# Altium PCB Eliot12L-Base02.PcbDoc
Units mm, origin at the board's own origin, x right, y up, seen from the top; angles counter-clockwise.
Board outline 44.58 x 44.59 mm, 2 copper layers (Top Layer, Bottom Layer), stack 1.569 mm thick; 29 components, 22 nets, 71 pads, 13 vias.
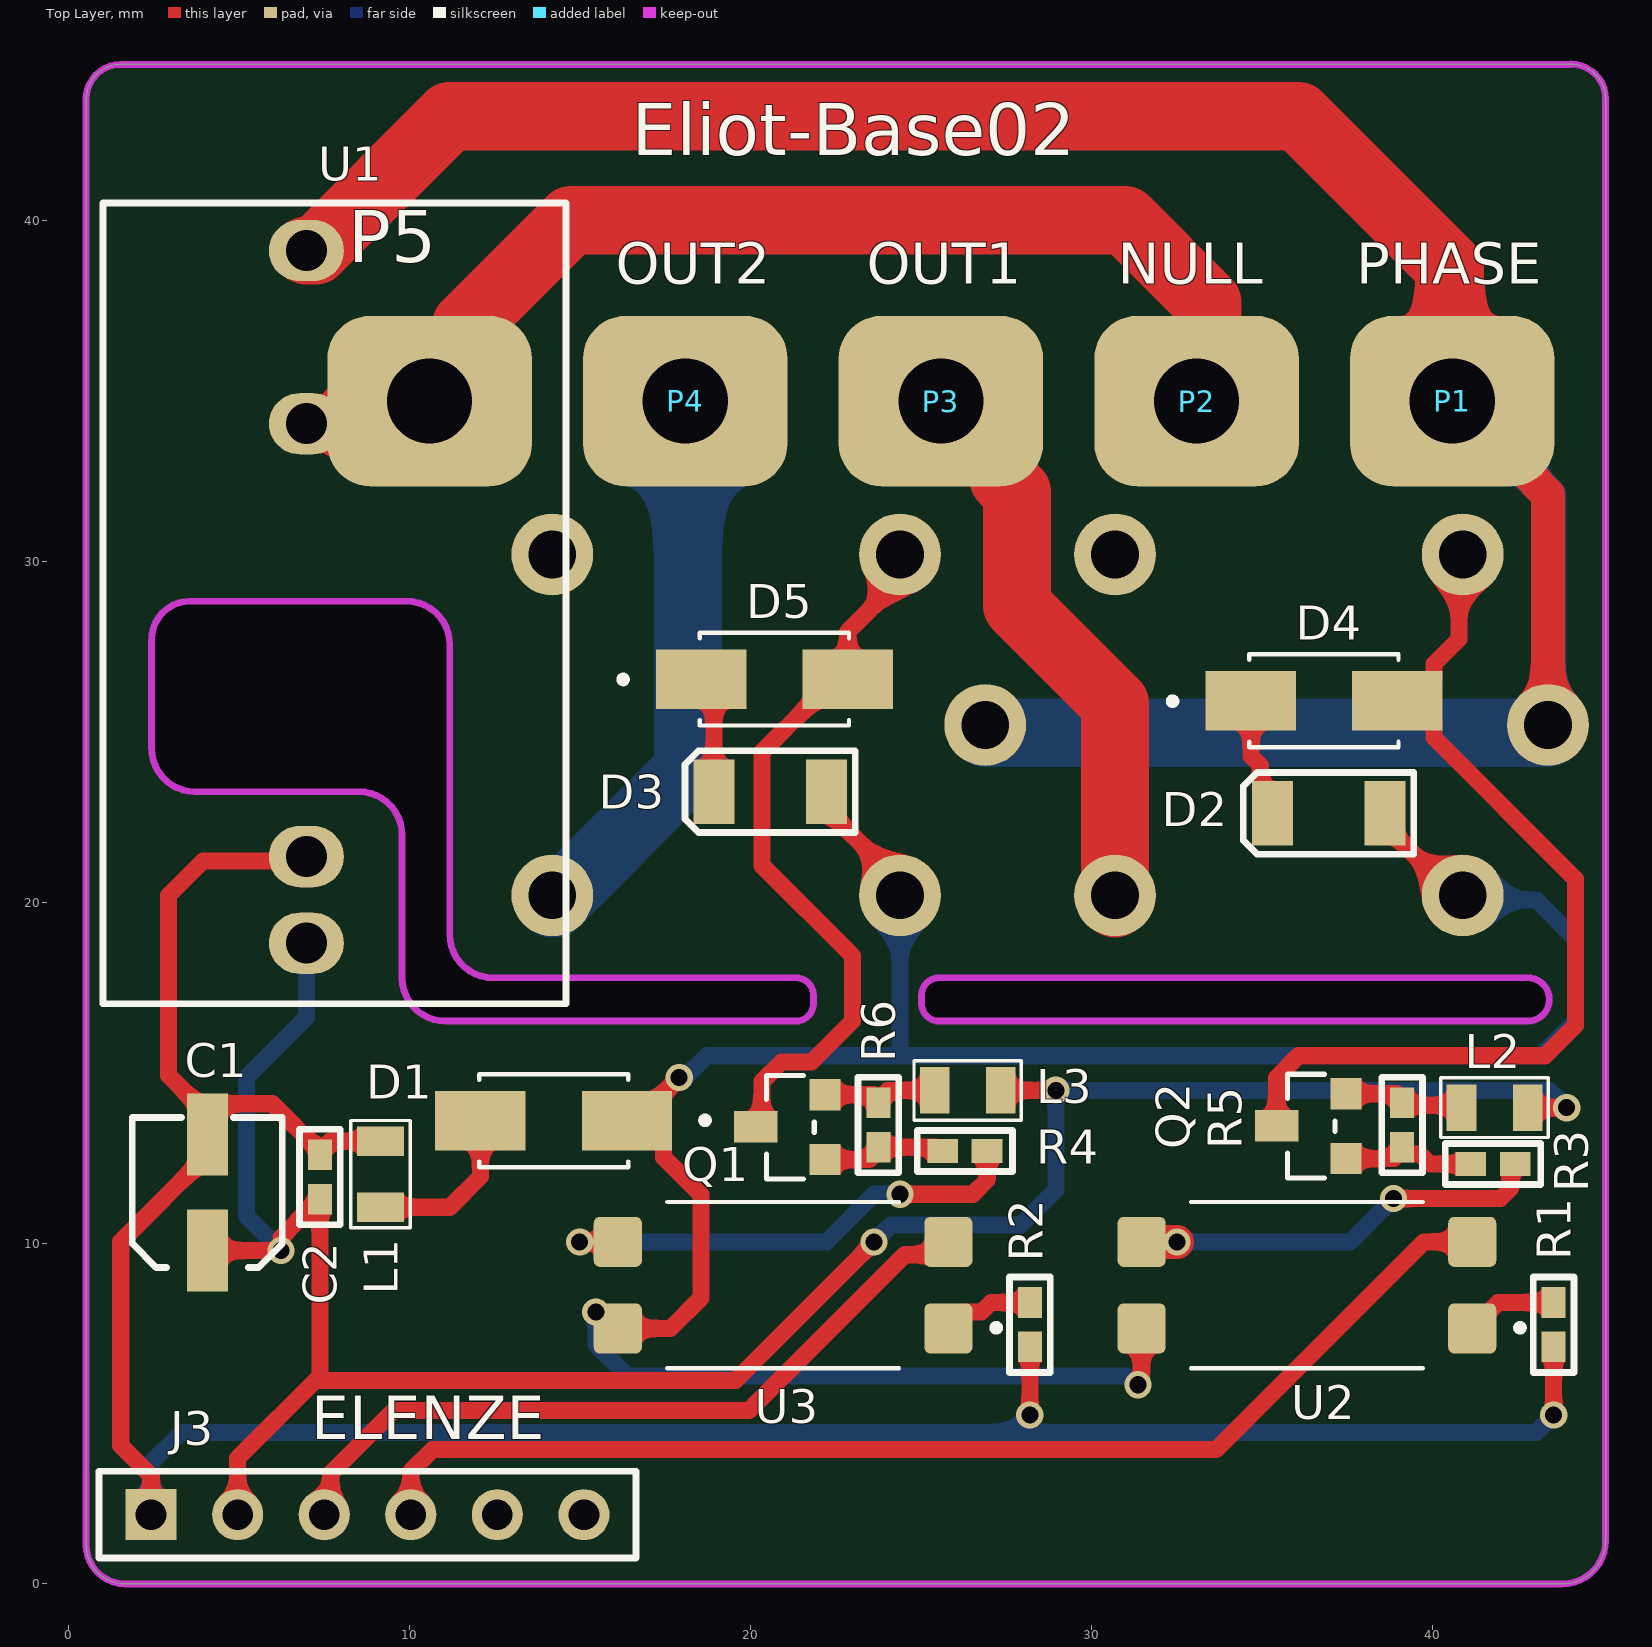
[diagram p0: Top Layer view]
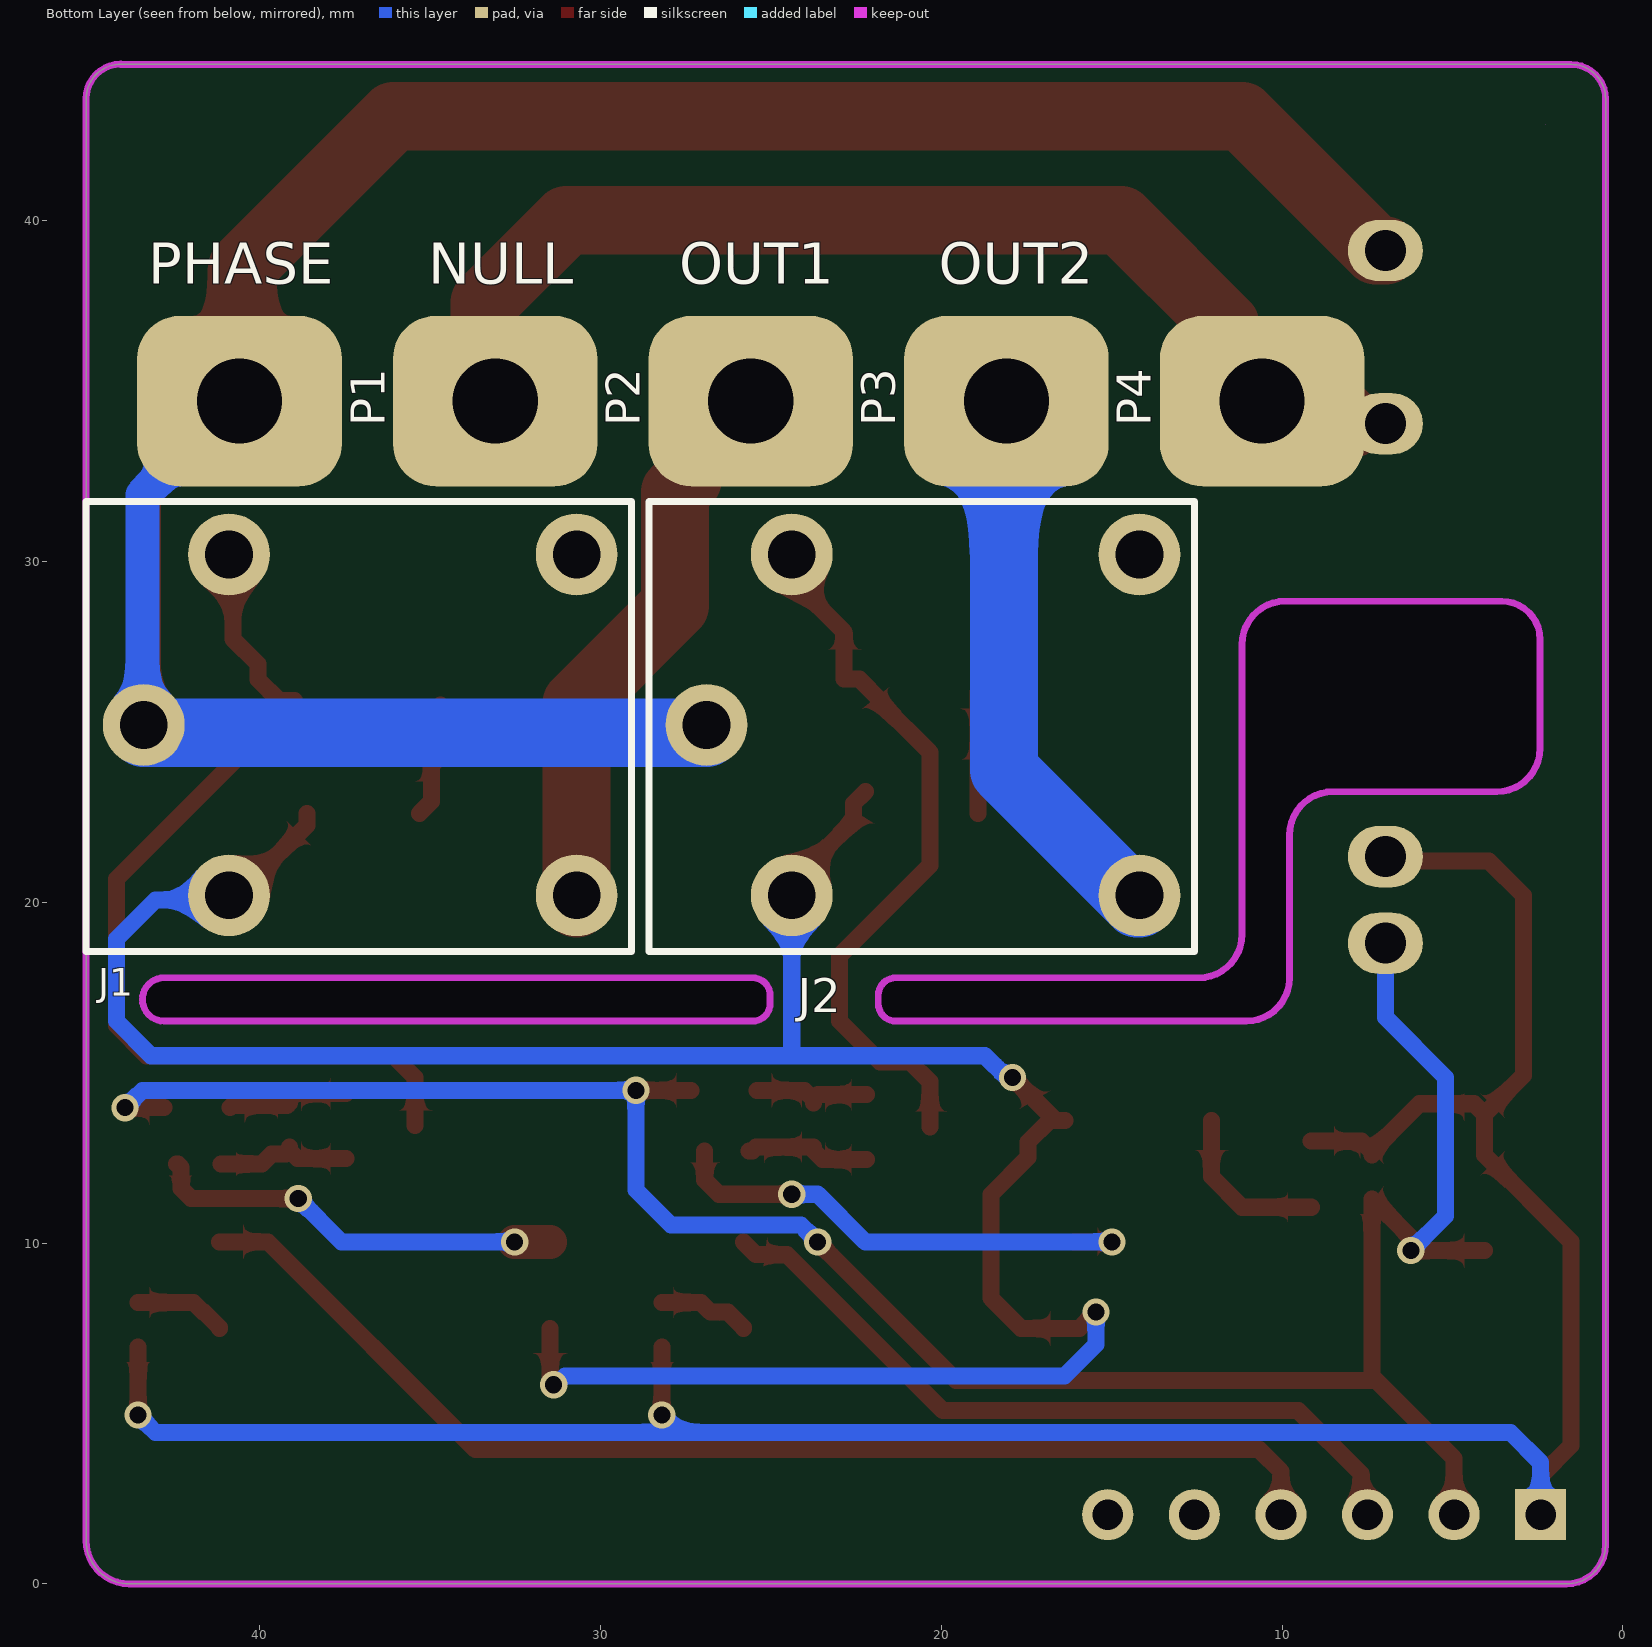
[diagram p1: Bottom Layer view, seen from below]

## Layer stack, top to bottom
Top Solder: solder mask 0.0254, SM-001, Dk 4
Top Layer: signal copper 0.035
Dielectric 1: core 1.4986, Core-043, Dk 4.3
Bottom Layer: signal copper 0.035
Bottom Solder: solder mask 0.0254, SM-001, Dk 4

## Board outline
0.508,1.143 0.508,43.561 cw(c1.524,43.561) 1.524,44.577 44.077,44.577 44.069,44.585 cw(c44.069,43.569) 45.085,43.569 45.085,1.27 cw(c43.815,1.27) 43.815,0 1.651,0 cw(c1.651,1.143)
cut-out: 3.556,28.829 9.906,28.829 cw(c9.906,27.559) 11.176,27.559 11.176,19.05 ccw(c12.446,19.05) 12.446,17.78 21.336,17.78 cw(c21.336,17.272) 21.844,17.272 21.844,17.018 cw(c21.336,17.018) 21.336,16.51 11.049,16.51 cw(c11.049,17.78) 9.779,17.78 9.779,21.971 ccw(c8.509,21.971) 8.509,23.241 3.701,23.241 cw(c3.701,24.511) 2.431,24.511 2.431,27.704 cw(c3.556,27.704)
cut-out: 25.019,17.272 cw(c25.527,17.272) 25.527,17.78 42.799,17.78 cw(c42.799,17.145) 43.434,17.145 cw(c42.799,17.145) 42.799,16.51 25.527,16.51 cw(c25.527,17.018) 25.019,17.018
cut-out: 2.286,42.799

## Design rules (kind name [scope] priority, off if disabled: settings)
Clearance [All] p1: gap=0.254 ignorepadtopadclearanceinfootprint=FALSE except(0: Arc-Hole Track-Hole SMDPad-Hole THPad-Hole Via-Hole Fill-Hole Poly-Hole Region-Hole Text-Hole)
MinimumSolderMaskSliver [All] p1: minsoldermaskwidth=0
PolygonConnect [All] p1: connectstyle=Relief reliefconductorwidth=0.254 reliefentries=4 polygonreliefangle="90 Angle" airgapwidth=0.254
RoutingVias [All] p1: holewidth=0.711 width=1.27 viastyle="Through Hole" minholewidth=0.711 minwidth=1.27 maxholewidth=0.711 maxwidth=1.27
SilkToSilkClearance [All] p1: silktosilkclearance=0
SilkToSolderMaskClearance [IsPad] p1: minsilkscreentomaskgap=0 clearancetoexposedcopper=TRUE
SolderMaskExpansion [All] p1: expansion=0.102 istentingtop=FALSE
Width [All] p1: maxlimit=3 minlimit=0.5 preferedwidth=0.5 minimp=50.000000 maximp=50.000000 favimp=50.000000
27 further rules are at their usual default settings.

## Components (designator, comment, footprint, x,y, rotation, side; value= is the part's Value field where it differs from the comment)
C1 "Cap Pol" EL_C_4_5 4.064,11.479 r90 top value=10uF
C2 "Cap" 0402 7.366,11.938 r90 top value=100nF
D1 "US1M-13-F" DIO_ES1J 14.224,13.589 r180 top
D2 "Diode Zener" DO1206 36.957,22.606 r180 top
D3 "Diode Zener" DO1206 20.574,23.241 r180 top
D4 "US1M-13-F" DIO_ES1J 36.821,25.908 r0 top
D5 "US1M-13-F" DIO_ES1J 20.701,26.543 r0 top
J1 "HJR-78F" RELAY 40.894,20.2 r180 bottom
J2 "HJR-78F" RELAY 24.384,20.2 r180 bottom
J3 "HEADER1x6" "M-Header 6" -21.463,-10.033 r0 top
L1 "EBMS201209A101" IND0805 -33.912,46.516 r270 top
L2 "EBMS201209A101" IND0805 76.326,57.026 r180 top
L3 "EBMS201209A101" IND0805 60.867,57.534 r180 top
P1 "MetalPin" MetalPin#1 5.715,33.401 r0 top
P2 "MetalPin" MetalPin#2 13.589,33.782 r0 top
P3 "MetalPin" MetalPin#3 22.987,34.163 r0 top
P4 "MetalPin" MetalPin#4 31.75,34.163 r0 top
P5 "MetalPin" MetalPin#5 24.714,35.388 r0 top
Q1 "SS8050" SOT-23 22.185,12.446 r90 top
Q2 "SS8050" SOT-23 37.465,12.476 r90 top
R1 "Res" 0402 43.561,7.605 r90 top value=1K
R2 "Res" 0402 28.194,7.605 r90 top value=1K
R3 "Res" 0402 41.783,12.319 r180 top value=1K
R4 "Res" 0402 26.289,12.7 r180 top value=1K
R5 "Res" 0402 39.116,13.462 r270 top value=10K
R6 "Res" 0402 23.749,13.462 r270 top value=10K
U1 "WX-DC12003" WX-DC12003 8.62,29.718 r180 top
U2 "EL817S1" SOIC254P1030X390-4N_EL817(S1)(A)(TU)-VG 36.322,8.763 r180 top
U3 "EL817S1" SOIC254P1030X390-4N_EL817(S1)(A)(TU)-VG 20.955,8.763 r180 top

## Footprints (in the part's own frame and the unit in brackets; to place one, negate y for a bottom-side part, rotate by r counter-clockwise, add the part's x,y. Pads: shape width x height; smd on the part's side, far side on the other; paste and mask are expansions set on the pad)
0402 [mm] "Chip Resistor, 2-Leads, Body 1.0x0.5mm, IPC Medium Density"
  rect 0.9x0.7 smd mask+0.15: 1(-0.65,0) 2(0.65,0)
  Top Layer pour cut-out: -0.508,0.889 0.508,0.889 0.508,-0.889 -0.508,-0.889
  silkscreen extent -1.4,-0.6 1.4,0.6, body extent -0.53,-0.25 0.47,0.25, height 0.27
DIO_ES1J [mm]
  rect 2.65x1.75 smd: A(2.15,0) K(-2.15,0)
  silkscreen extent -4.54,-1.36 2.19,1.36
DO1206 [mm] "MELF Diode, 2-Leads, Body 3.5x1.7mm, IPC Medium Density"
  rect 1.2x1.9 smd mask+0.15: 1(-1.65,0) 2(1.65,0)
  Top Layer pour cut-out: -1.397,1.524 1.397,1.524 1.397,-1.524 -1.397,-1.524
  silkscreen extent -2.5,-1.2 2.5,1.2, body extent -1.85,-0.86 1.85,0.86, height 1.71
EL_C_4_5 [mm]
  rect 2.4x1.2 smd: 1(1.7,0) 2(-1.7,0)
  silkscreen extent -2.2,-2.2 2.2,2.2, body extent -2.5,-2.15 2.5,2.15, height 5.5
IND0805 [mm]
  rect 0.87x1.37 smd: 1(33.527,43.056) 2(35.467,43.056)
  silkscreen extent 32.92,42.18 36.07,43.93, body extent 33.47,42.41 35.52,43.71, height 0.5
"M-Header 6" [mm]
  rect 1.5x1.5 hole 0.9: 1(23.876,12.065)
  round 1.5 hole 0.9: 2(26.416,12.065) 3(28.956,12.065) 4(31.496,12.065) 5(34.036,12.065) 6(36.576,12.065)
  silkscreen extent 22.35,10.79 38.1,13.33, body extent 22.36,10.81 38.1,13.31, height 5
MetalPin#1 [mm]
  rrect50% 6x5 hole 2.5: 1(34.87,1.299)
MetalPin#2 [mm]
  rrect50% 6x5 hole 2.5: 1(19.496,0.918)
MetalPin#3 [mm]
  rrect50% 6x5 hole 2.5: 1(2.598,0.537)
MetalPin#4 [mm]
  rrect50% 6x5 hole 2.5: 1(-13.665,0.537)
MetalPin#5 [mm]
  rrect50% 6x5 hole 2.5: 1(-14.129,-0.688)
RELAY [mm]
  round 2.4 hole 1.4: 1(-2.5,5) 2(10.2,10) 3(10.2,0) 4(0,0) 5(0,10)
  silkscreen extent -4.19,-1.65 11.81,11.56
SOIC254P1030X390-4N_EL817(S1)(A)(TU)-VG [mm]
  rrect25% 1.41x1.47 smd: 1(-4.85,1.27) 2(-4.85,-1.27) 3(4.85,-1.27) 4(4.85,1.27)
  silkscreen extent -6.35,-2.44 3.4,2.44
SOT-23 [mil]
  rect 36x36 smd: 1(0,0) 2(75,0)
  rect 36x50 smd: 3(38,80)
  silkscreen extent -22,12 97,68
WX-DC12003 [mm]
  oval 2.2x1.8 hole 1.2 mask+0.15: 1(1.651,-9.398) 2(1.651,-4.318) 3(1.651,10.922) 4(1.651,8.382)
  silkscreen extent -5.97,-10.8 7.62,12.7, body extent -5.9,-10.76 7.59,12.74, height 18.25

## Part data
C1: "Polarized Capacitor (Axial)", LatestRevisionDate=17-Jul-2002, LatestRevisionNote="Re-released for DXP Platform.", PackageDescription="Polarized Capacitor; 2 Leads", PackageReference=POLAR0.8, Published=8-Jun-2000, Publisher="Altium Limited"
C2: "Capacitor", LatestRevisionDate=17-Jul-2002, LatestRevisionNote="Re-released for DXP Platform.", PackageDescription="Radial Cap, Thru-Hole; 2 Leads; 0.3 in Pin Spacing", PackageReference=RAD-0.3, Published=8-Jun-2000, Publisher="Altium Limited"
D1 D4 D5: "Diode Standard 1000V 1A Surface Mount SMA", Package="DO-214 Diodes Inc.", Availability=Unavailable, MF="Diodes Inc.", MP=US1M-13-F, Price=None, SnapEDA_Link=https://www.snapeda.com/parts/US1M-13-F/Diodes%20Inc./view-part/270779/?ref=snap
D2 D3: "Zener Diode", LatestRevisionDate=17-Jul-2002, LatestRevisionNote="Re-released for DXP Platform.", PackageDescription="Diode, Thru-Hole; 2 Leads; 0.7 in Pin Spacing", PackageReference=DIODE-0.7, Published=8-Jun-2000, Publisher="Altium Limited"
J1 J2: "20A switching capability Small size auto Relay", Manufacturer=Tianbo, Package="Through Hole", Part Number="TRKM S-Z"
J3: "HEADER 1x6"
L1 L2 L3: library part "INDUCTOR SMD", "INDUCTOR SMD"
Q1 Q2: "NPN General Purpose Amplifier", ComponentLink1Description="Manufacturer Link", ComponentLink1URL=http://www.fairchildsemi.com/, ComponentLink2Description=Datasheet, ComponentLink2URL=http://www.fairchildsemi.com/ds/2N%2F2N3904.pdf, DatasheetVersion=1997, LatestRevisionDate=15-Jan-2003, LatestRevisionNote="PCB Footprint 'BCY-W3/D4.7' replaced", PackageDescription="TO, Flat Index; 3 In-Line, Axial Leads; Body Dia. 4.5mm; Leads 0.51 x 0.48 mm (max)", PackageReference=TO-92A, PackageVersion=Sep-1998, Published=8-Jun-2000, Publisher="Altium Limited"
R1 R2 R3 R4 R5 R6: "Resistor", LatestRevisionDate=17-Jul-2002, LatestRevisionNote="Re-released for DXP Platform.", PackageDescription="Axial Device, Thru-Hole; 2 Leads; 0.3 in Pin Spacing", PackageReference=AXIAL-0.3, Published=8-Jun-2000, Publisher="Altium Limited"
U1: "85~265V AC to 5V 3.5W DC Isolated Power Supply Module", Manufacturer="Aerial telecommunications", Package=Module, Part Number=WX-DC12003
U2 U3: "4 PIN DIP Phototransistor Photocoupler", Manufacturer=Everlight, Package="Surface Mount Lead", Part Number=EL817S1

## Via types
v1: diameter 0.8, hole 0.5, Top Layer to Bottom Layer, tented both sides, 13 vias

## Nets (pads, with @x,y where several pads share a name; then routed paths per layer and width w, separated by ;. In a path a pad name is that pad's centre, name@x,y a point inside that pad or via, vN(x,y) a via of type N, cw(c..) or ccw(c..) an arc to the next point about the centre after c; other vN are vias at no path point)
+5VDD: C1.1 C2.2 J3.1 L1.1 R1.1 R2.1 U1.4 | length 78.9
  Top Layer w0.5: J3.1 2.413,3.175 1.524,4.064 1.524,10.039 4.064,12.579 C1.1 C1.1@4.064,13.779 ; U1.4 6.842,21.209 3.937,21.209 2.921,20.193 2.921,14.922 C1.1@4.064,13.779 ; C2.2 C2.2@7.366,12.688 ; U1.4@7.493,21.336 7.62,21.209 U1.4@7.747,21.336 ; L1.1 7.667,12.989 C2.2@7.366,12.688 ; v1(28.194,4.953) R2.1 ; v1(43.561,4.953) R1.1 ; C1.1@4.064,13.779 4.37,14.085 5.969,14.085 C2.2@7.366,12.688
  Bottom Layer w0.5: J3.1 2.413,3.556 3.302,4.445 27.686,4.445 ; v1(28.194,4.953) 27.686,4.445 ; v1(43.561,4.953) 43.053,4.445 27.686,4.445
GND: C1.2 C2.1 J3.2 L2.1 L3.1 U1.3 | length 69.4
  Top Layer w0.5: C1.2 v1@6.211,9.779 ; J3.2 4.953,3.683 7.366,6.096 C2.1 7.366,11.188 7.266,11.088 7.151,11.088 6.223,10.16 v1(6.223,9.779) ; 7.366,5.969 19.558,5.969 v1(23.622,10.033) ; L3.1 v1(28.956,14.478) ; L2.1 v1(43.942,13.97)
  Bottom Layer w0.5: v1(6.223,9.779) 5.207,10.795 5.207,14.859 6.969,16.621 U1.3 ; v1(23.622,10.033) 23.749,10.16 24.115,10.526 27.925,10.526 28.956,11.557 v1(28.956,14.478) 43.434,14.478 v1(43.942,13.97)
NetD1_A: D1.A L1.2 | length 4.9
  Top Layer w0.5: L1.2 11.176,11.049 12.074,11.947 D1.A
NetD1_K: D1.K D2.1 D3.1 J1.4 J2.4 U2.4 U3.4 | length 76
  Top Layer w0.5: v1(15.46,7.975) 15.941,7.493 U3.4 17.653,7.493 18.542,8.382 18.542,11.421 17.449,12.514 17.449,12.964 16.824,13.589 D1.K@16.637,13.589 ; D1.K D1.K@16.637,13.589 ; v1(17.907,14.859) D1.K@16.637,13.589 ; D3.1 22.574,22.891 22.574,22.384 24.384,20.574 J2.4@24.384,19.969 ; v1(31.369,5.842) 31.472,5.945 U2.4 ; D2.1 38.607,22.256 J1.4@40.894,19.969
  Bottom Layer w0.5: v1(15.46,7.975) 15.46,7.019 16.383,6.096 31.034,6.096 31.288,5.842 v1(31.369,5.842) ; v1(17.907,14.859) 18.088,14.859 18.723,15.494 43.18,15.494 44.196,16.51 44.196,18.923 43.053,20.066 41.028,20.066 J1.4 ; 24.384,15.748 J2.4@24.384,19.969
NetD2_2: D2.2 D4.K | length 3.4
  Top Layer w0.5: D4.K@34.682,25.781 34.682,24.283 34.957,24.008 34.957,22.956 D2.2
NetD3_2: D3.2 D5.K | length 4.1
  Top Layer w0.5: D5.K 18.924,26.17 D3.2 D3.2@18.924,22.606
NetD4_A: D4.A J1.5 Q2.3 | length 27.6
  Top Layer w0.5: Q2.3 35.433,14.859 36.068,15.494 43.307,15.494 44.196,16.383 44.196,20.683 40.046,24.833 40.046,25.283 D4.A@39.421,25.908 ; D4.A@38.521,25.4 D4.A@38.971,25.4 ; D4.A D4.A@39.421,25.908 ; J1.5@40.894,29.669 40.782,29.557 40.782,27.719 40.046,26.983 40.046,26.533 D4.A@39.421,25.908
NetD5_A: D5.A J2.5 Q1.3 | length 20.9
  Top Layer w0.5: Q1.3@20.331,13.411 20.331,14.732 20.911,15.312 21.789,15.312 22.987,16.51 22.987,18.426 20.331,21.082 20.331,24.397 21.776,25.842 21.776,25.918 22.401,26.543 D5.A 22.851,27.931 J2.5@24.194,29.274 ; J2.5@24.384,29.728 J2.5
NetJ1_3: J1.3 P3.1 | length 17.1
  Top Layer w2: P3.1 25.95,34.7 27.431,33.219 27.431,32.411 27.813,32.028 27.813,28.702 30.694,25.821 J1.3@30.694,19.969
NetJ2_3: J2.3 P4.1 | length 16.5
  Bottom Layer w2: J2.3@14.184,19.969 14.254,19.969 18.161,23.876 18.161,34.624 P4.1
NetL2_2: L2.2 Q2.2 R5.1 | length 3.6
  Top Layer w0.5: Q2.2 38.947,14.381 39.116,14.212 R5.1 39.187,14.041 40.788,14.041 L2.2
NetL3_2: L3.2 Q1.2 R6.1 | length 3.5
  Top Layer w0.5: Q1.2 23.61,14.351 R6.1@23.749,14.212 ; R6.1 R6.1@23.749,14.212 ; L3.2 24.015,14.478 R6.1@23.749,14.212
NetQ1_1: Q1.1 R4.2 R6.2 | length 3.7
  Top Layer w0.5: Q1.1 23.483,12.446 23.749,12.712 R6.2 25.427,12.812 25.539,12.7 R4.2
NetQ2_1: Q2.1 R3.2 R5.2 | length 4
  Top Layer w0.5: Q2.1 38.88,12.476 R5.2@39.116,12.712 ; R5.2 R5.2@39.116,12.712 ; R3.2 39.933,12.319 39.64,12.612 39.216,12.612 R5.2@39.116,12.712
NetR1_2: R1.2 U2.1 | length 2.7
  Top Layer w0.5: U2.1 41.172,7.523 41.627,7.978 41.657,7.978 41.934,8.255 R1.2
NetR2_2: R2.2 U3.1 | length 2.7
  Top Layer w0.5: U3.1 25.805,7.523 26.26,7.978 26.774,7.978 27.051,8.255 R2.2
NetR3_1: R3.1 U2.3 | length 12.3
  Top Layer w0.5: v1(38.862,11.303) 42.003,11.303 42.295,11.596 42.295,12.219 42.395,12.319 R3.1
  Top Layer w1: U2.3 v1(32.512,10.033)
  Bottom Layer w0.5: v1(32.512,10.033) 37.592,10.033 v1(38.862,11.303)
NetR4_1: R4.1 U3.3 | length 14.7
  Top Layer w0.5: v1(14.986,10.033) U3.3 ; v1(24.384,11.43) 26.519,11.43 26.939,11.85 R4.1
  Bottom Layer w0.5: v1(14.986,10.033) 22.225,10.033 23.622,11.43 v1(24.384,11.43)
NULL: P2.1 P5.1 U1.2 | length 31.7
  Top Layer w2: P5.1@7.969,34.036 P5.1@9.359,35.426 ; P5.1 11.659,35.774 11.659,36.932 14.732,40.005 30.988,40.005 33.401,37.592 33.401,35.016 P2.1
PHASE: J1.1 J2.1 P1.1 U1.1 | length 80.3
  Top Layer w1: P1.1 40.645,34.7 41.115,34.23 41.149,34.23 43.06,32.32 43.06,32.285 43.394,31.951 J1.1@43.394,24.969
  Top Layer w2: U1.1 7.239,39.116 11.176,43.053 36.068,43.053 40.513,38.608 P1.1@40.513,33.772
  Bottom Layer w1: P1.1 40.679,34.7 43.434,31.945 J1.1@43.434,24.969
  Bottom Layer w2: J2.1@26.884,24.969 J1.1@43.394,24.969
RELAY01: J3.3 U3.2 | length 22.2
  Top Layer w0.5: J3.3 7.684,2.223 7.684,3.239 9.525,5.08 19.947,5.08 24.526,9.659 25.431,9.659 U3.2
RELAY02: J3.4 U2.2 | length 35.2
  Top Layer w0.5: J3.4 10.033,3.302 10.668,3.937 33.655,3.937 39.751,10.033 U2.2
pads on no net: J1.2 J2.2 J3.5 J3.6

## Keep-outs
Keep-Out Layer:
  lines w0.2: 0.508,43.561 cw(c1.524,43.561) 1.524,44.577 44.077,44.577 ; 0.508,43.569 0.508,1.143 ccw(c1.651,1.143) 1.651,0 43.823,0 ; 43.815,0 ccw(c43.815,1.27) 45.085,1.27 45.085,43.569 ccw(c44.069,43.569) 44.069,44.585 ; 2.431,24.511 ccw(c3.701,24.511) 3.701,23.241 3.81,23.241 8.509,23.241 cw(c8.509,21.971) 9.779,21.971 9.779,17.78 ccw(c11.049,17.78) 11.049,16.51 21.336,16.51 ccw(c21.336,17.018) 21.844,17.018 21.844,17.272 ccw(c21.336,17.272) 21.336,17.78 12.446,17.78 cw(c12.446,19.05) 11.176,19.05 11.176,27.559 ccw(c9.906,27.559) 9.906,28.829 3.556,28.829 ccw(c3.556,27.704) 2.431,27.704 2.431,24.511 ; 25.019,17.018 ccw(c25.527,17.018) 25.527,16.51 42.799,16.51 ccw(c42.799,17.145) 43.434,17.145 ccw(c42.799,17.145) 42.799,17.78 25.527,17.78 ccw(c25.527,17.272) 25.019,17.272 25.019,17.018

## Silkscreen, mask and mechanical layers (free items; w line width, h text height)
Top Overlay:
  text "Eliot-Base02" at 16.51,41.91 h1.52
  text "OUT2" at 16.048,38.146 h1.2
  text "OUT1" at 23.414,38.146 h1.2
  text "NULL" at 30.78,38.146 h1.2
  text "PHASE" at 37.765,38.146 h1.2
  text "ELENZE" at 7.112,3.821 h2.2
Bottom Overlay:
  text "OUT2" at 20.067,38.146 h1.2
  text "OUT1" at 27.687,38.146 h1.2
  text "NULL" at 35.053,38.146 h1.2
  text "PHASE" at 43.261,38.146 h1.2